# Altium PCB PCB1.PcbDoc
Units mil, origin at the board's own origin, x right, y up, seen from the top; angles counter-clockwise.
Board outline 3686.84 x 3989.91 mil, 2 copper layers (Top Layer, Bottom Layer); 93 components, 98 nets, 289 pads, 0 vias.
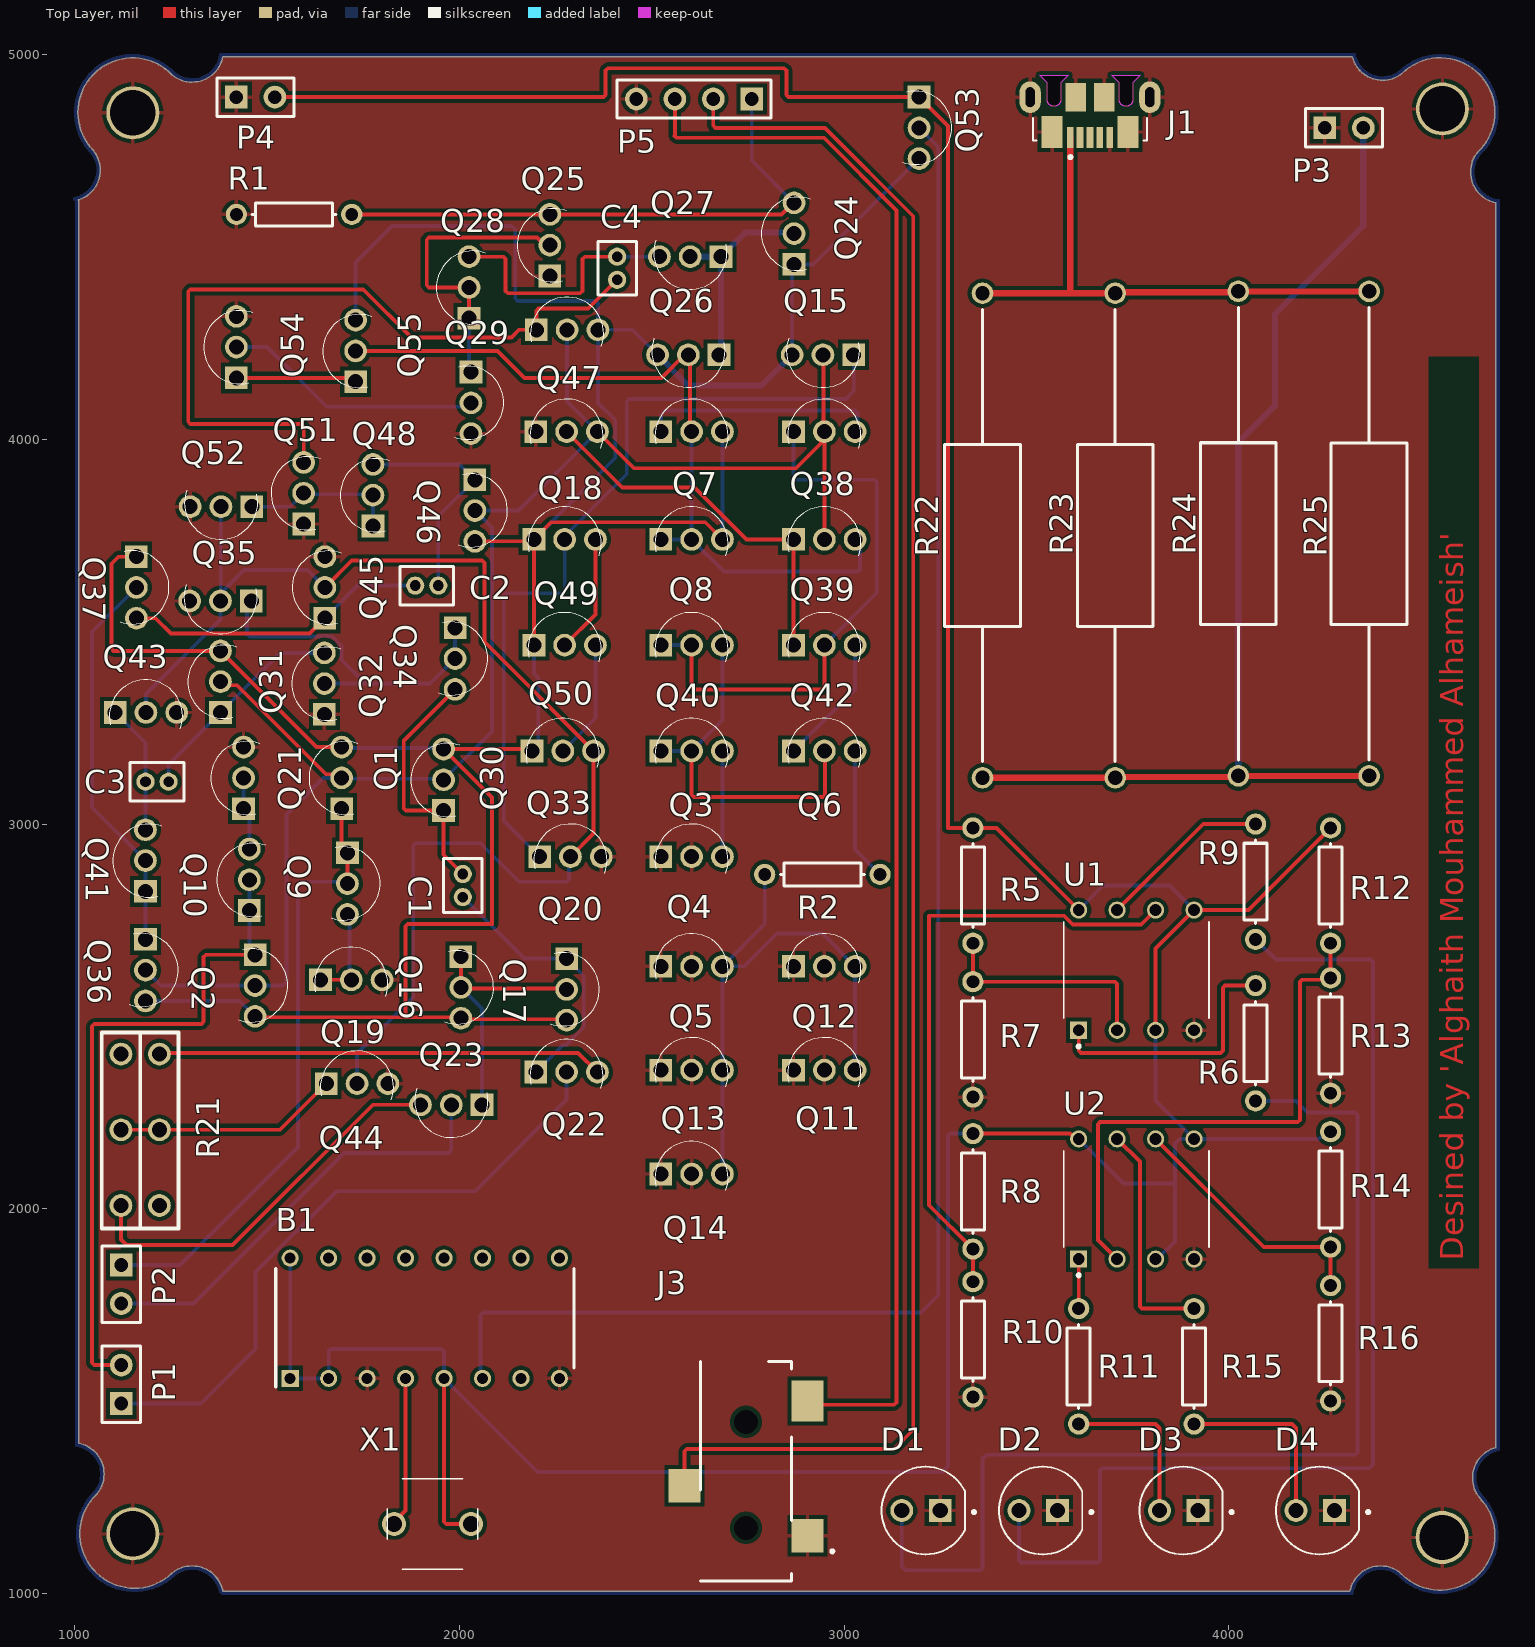
[diagram p0: Top Layer view]
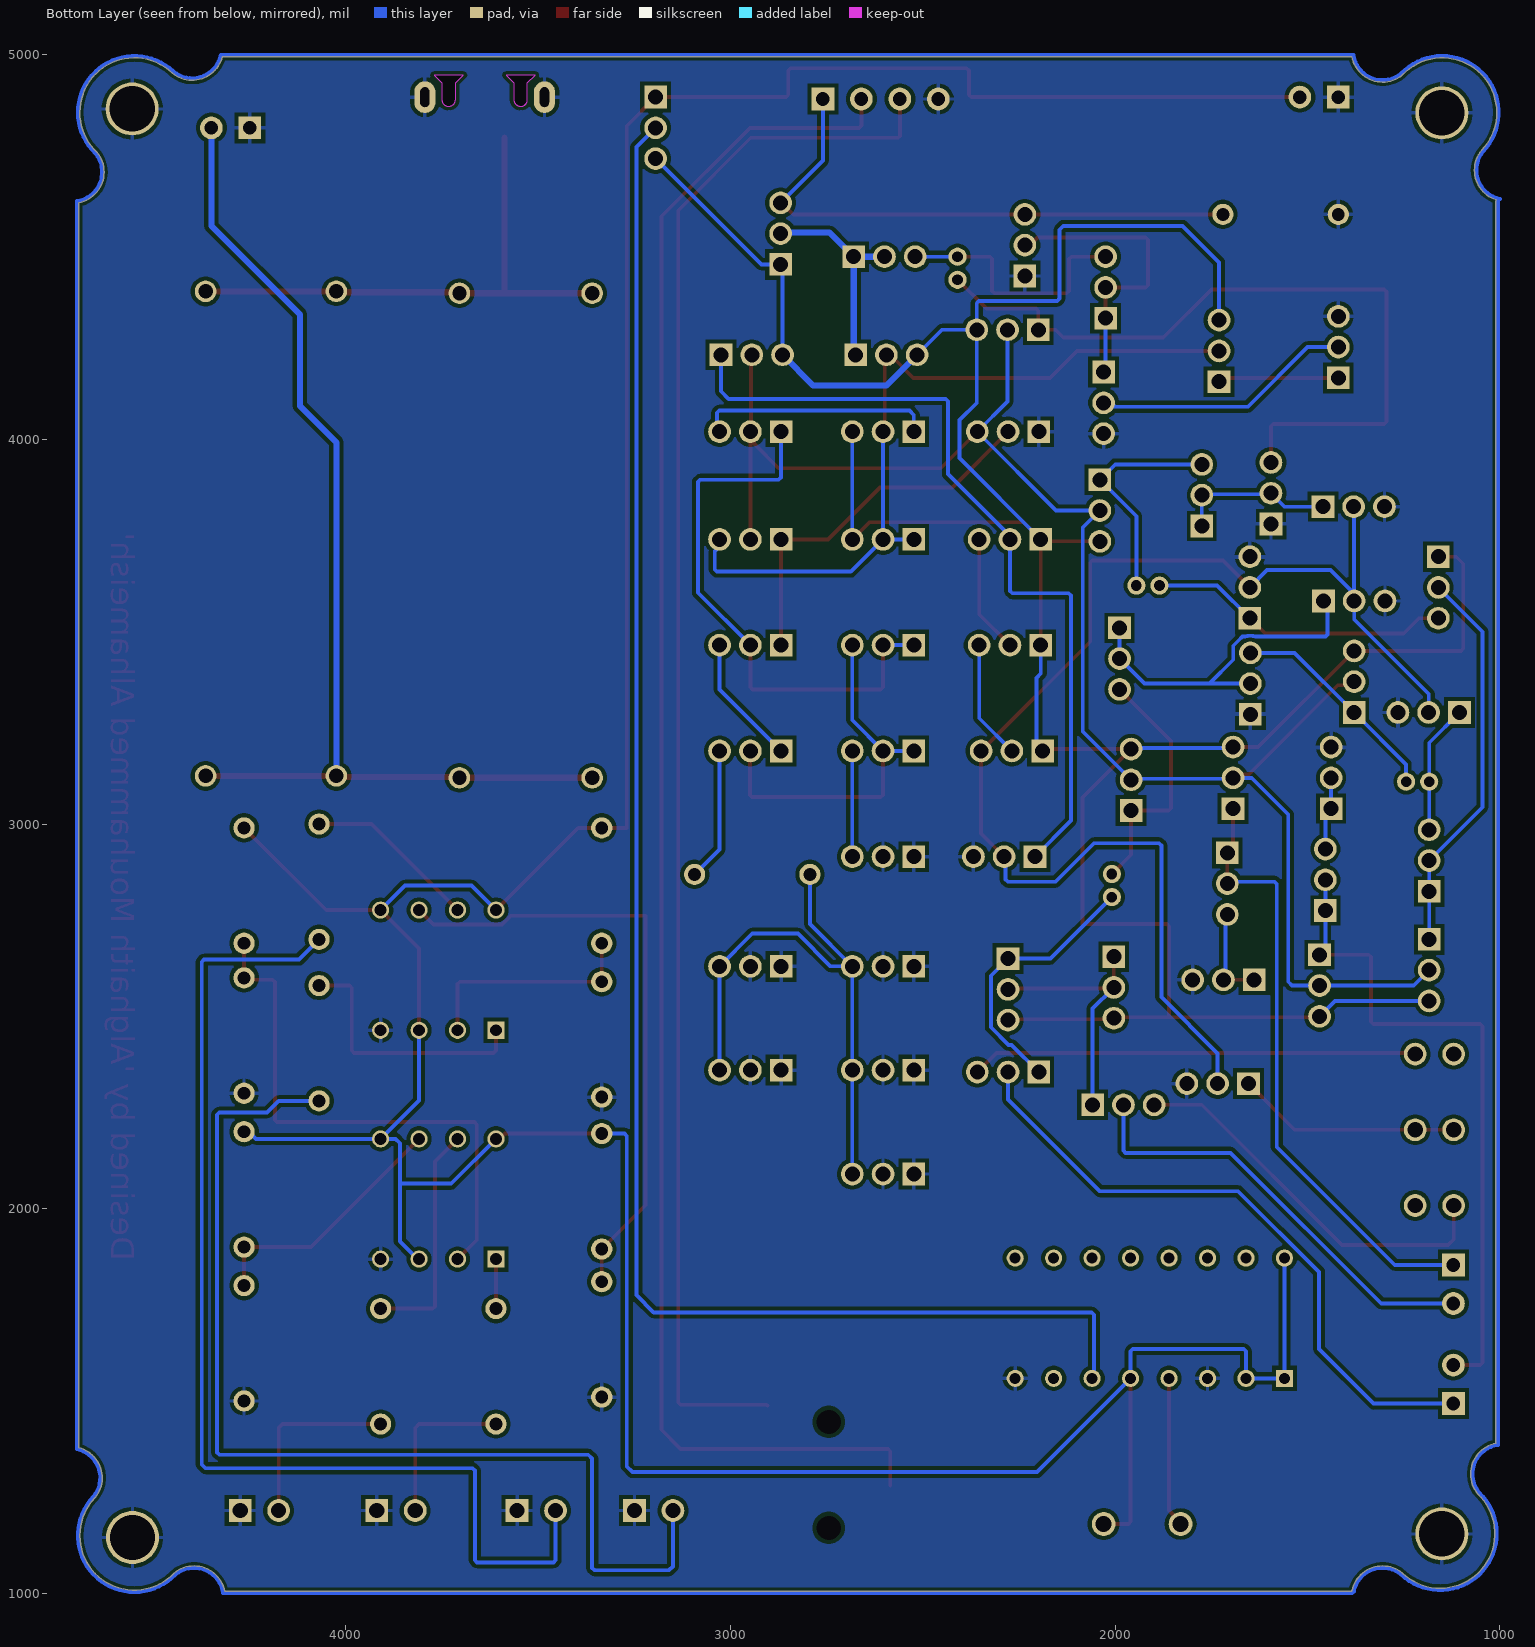
[diagram p1: Bottom Layer view, seen from below]
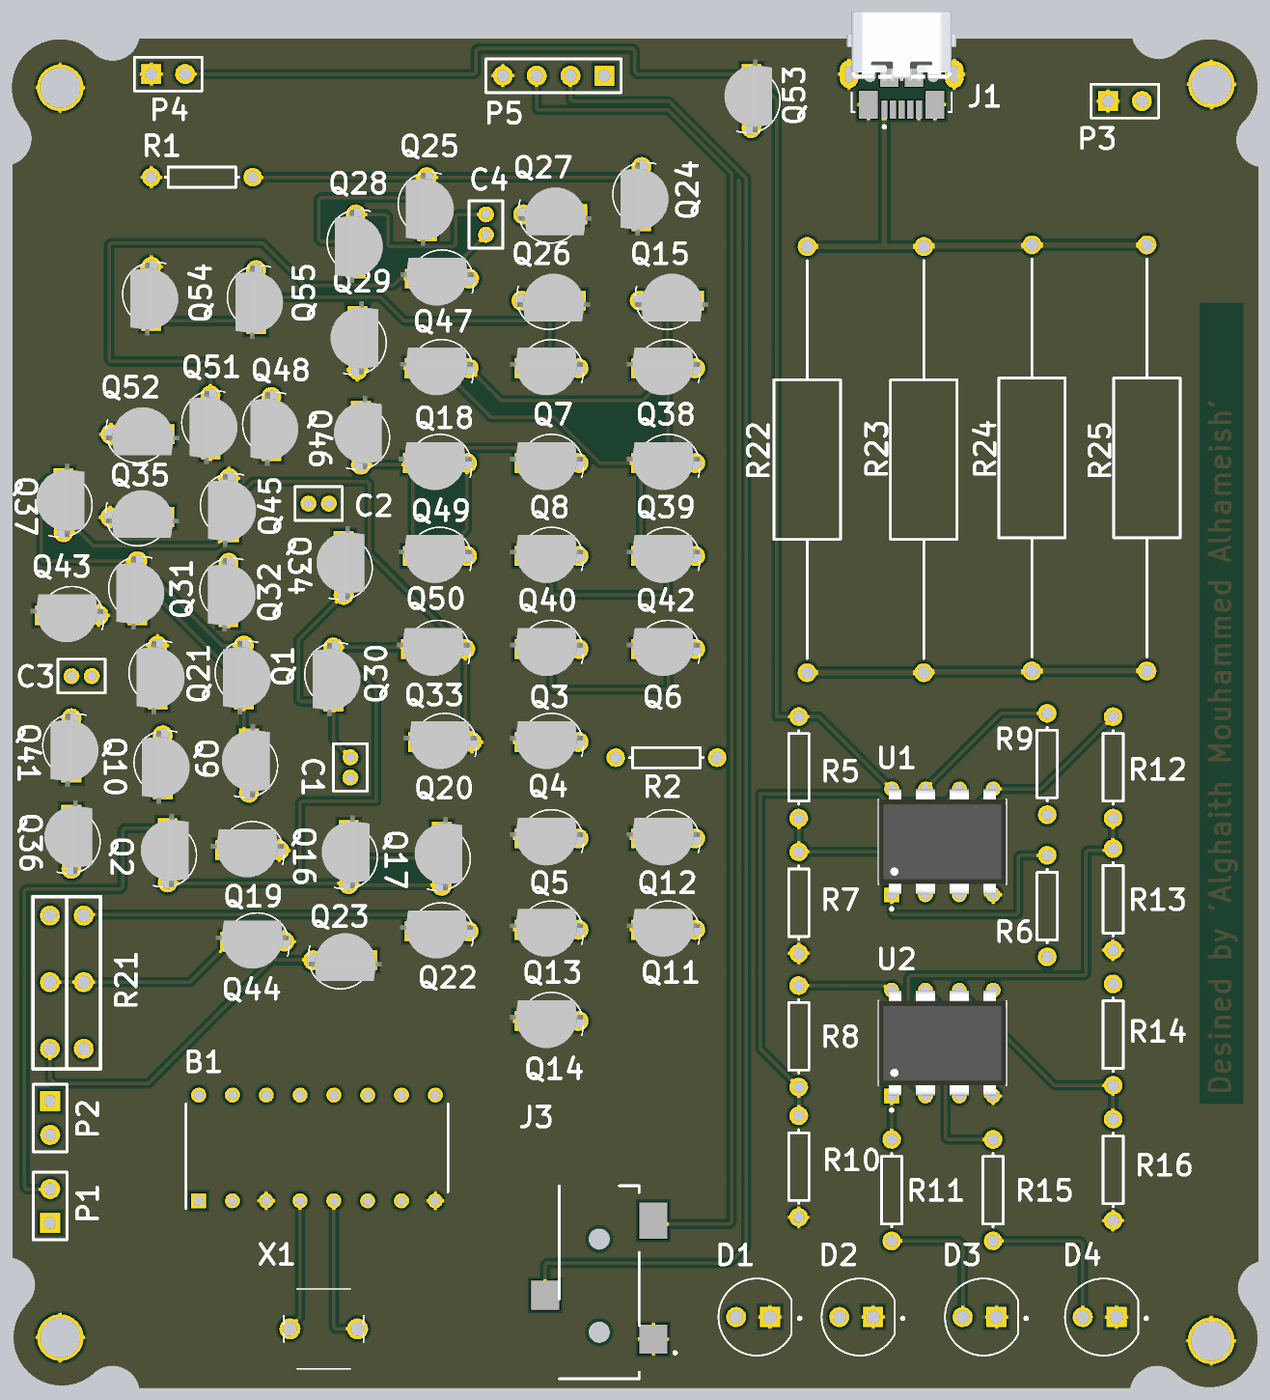
[diagram p2: 3D render of the assembled board from above, using the file's embedded part models]

## Layer stack, top to bottom
Top Solder: solder mask 0.4, Solder Resist, Dk 3.5
Top Layer: signal copper 1.4
Dielectric 1: dielectric 12.6, FR-4, Dk 4.8
Bottom Layer: signal copper 1.4
Bottom Solder: solder mask 0.4, Solder Resist, Dk 3.5

## Board outline
1057.59,1258.43 ccw(c995,1310) 1076.1,1310 ccw(c995,1310) 1010.07,1389.69 1010.07,4620.35 1009.49,4622.69 ccw(c985,4700) 1066.1,4700 ccw(c985,4700) 1047.59,4751.57 1047.1,4752.08 cw(c1150,4850) 1252.98,4947.83 1253.43,4947.41 ccw(c1305,5010) 1384.7,4994.98 4321.41,4994.98 ccw(c4400,5015) 4451.57,4952.41 4452.08,4952.9 cw(c4550,4850) 4692.04,4850 cw(c4550,4850) 4647.83,4747.02 4647.41,4746.57 ccw(c4710,4695) 4694.93,4615.31 4694.93,1378.58 ccw(c4715,1300) 4652.41,1248.43 4652.9,1247.92 cw(c4550,1150) 4692.04,1150 cw(c4550,1150) 4447.02,1052.17 4446.57,1052.59 ccw(c4395,990) 4315.31,1005.07 1384.61,1005.07 1384.51,1005.99 ccw(c1305,990) 1253.43,1052.59 1252.92,1052.1 cw(c1155,1155)

## Design rules (kind name [scope] priority, off if disabled: settings)
Clearance [All] p1: gap=10 ignorepadtopadclearanceinfootprint=FALSE except(0: Arc-Hole Track-Hole SMDPad-Hole THPad-Hole Via-Hole Fill-Hole Poly-Hole Region-Hole Text-Hole)
PolygonConnect [All] p1: connectstyle=Relief reliefconductorwidth=10 reliefentries=4 polygonreliefangle="90 Angle" airgapwidth=10
RoutingVias [All] p1: holewidth=28 width=50 viastyle="Through Hole" minholewidth=28 minwidth=50 maxholewidth=28 maxwidth=50
SolderMaskExpansion [All] p1: expansion=4 istentingtop=FALSE
Width [All] p1: maxlimit=20 minlimit=10 preferedwidth=10
30 further rules are at their usual default settings.

## Classes and differential pairs
component class Sheet2: Q54 Q55 Q56 Q57 Q58 Q59 Q60 Q61 Q62 Q63 Q64 Q65 Q66 Q67 Q68 Q69 Q70 Q71 Q72 Q73 Q74 Q75 Q76 Q77 Q78 Q79 Q80 Q81 Q82 Q83 Q84 Q85 Q86 Q87 Q88 Q89 Q90 Q91 Q92 Q93 Q94 Q95 Q96 Q97 Q98 Q99 Q100 Q101 Q102 Q103 Q104 Q105 V4 V5 V8 V9 V10

## Components (designator, comment, footprint, x,y, rotation, side; value= is the part's Value field where it differs from the comment)
B1 "CD74HC109E" DIP794W53P254L1930H508Q16N 1910,1715 r90 top
C1 "Cap" PCBComponent_1 2008.7,2810 r0 top value=500p
C2 "Cap" PCBComponent_1 1885,3620 r270 top value=1uF
C3 "Cap" PCBComponent_1 1243.7,3110 r90 top value=1uF (schematic designator C?)
C4 "Cap" PCBComponent_1 2410,4415 r0 top value=1uF
D1 "151054RS03000" LED_151054RS03000 3200,1215 r180 top
D2 "151054RS03000" LED_151054RS03000 3505,1215 r180 top
D3 "151054RS03000" LED_151054RS03000 3870,1215 r180 top
D4 "151054RS03000" LED_151054RS03000 4225,1215 r180 top
J1 "1932788-1" TE_1932788-1 3639.41,4889.72 r180 top
J3 "35RASMT4BHNTRX" 35RASMT4BHNTRX 2745,1319.61 r90 top
P1 "Header 2" HDR1X2 1120.73,1493.37 r90 top
P2 "Header 2" HDR1X2 1120.73,1853.37 r270 top
P3 "Header 2" HDR1X2 4250,4810 r0 top
P4 "Header 2" HDR1X2 1420,4890 r0 top
P5 "Header 4" HDR1X4 2760,4885 r180 top
Q1 "BC557BRL1G" TO127P254X732-3 1653.7,3170 r90 top
Q2 "BC557BRL1G" TO127P254X732-3 1508.7,2530 r270 top
Q3 "BC337-40_A1G" TO127P254X732-3 2653.7,3230 r0 top
Q4 "BC557BRL1G" TO127P254X732-3 2653.7,2955 r0 top
Q5 "BC557BRL1G" TO127P254X732-3 2653.7,2670 r0 top
Q6 "BC337-40_A1G" TO127P254X732-3 2998.7,3230 r0 top
Q7 "BC557BRL1G" TO127P254X732-3 2653.7,4060 r0 top
Q8 "BC557BRL1G" TO127P254X732-3 2653.7,3780 r0 top
Q9 "BC337-40_A1G" TO127P254X732-3 1748.7,2795 r270 top
Q10 "BC337-40_A1G" TO127P254X732-3 1413.7,2905 r90 top
Q11 "BC557BRL1G" TO127P254X732-3 2998.7,2400 r0 top
Q12 "BC557BRL1G" TO127P254X732-3 2998.7,2670 r0 top
Q13 "BC557BRL1G" TO127P254X732-3 2653.7,2400 r0 top
Q14 "BC557BRL1G" TO127P254X732-3 2653.7,2130 r0 top
Q15 "BC557BRL1G" TO127P254X732-3 2895,4180 r180 top
Q16 "BC557BRL1G" TO127P254X732-3 2043.7,2525 r270 top
Q17 "BC557BRL1G" TO127P254X732-3 2318.7,2520 r270 top
Q18 "BC557BRL1G" TO127P254X732-3 2328.7,4060 r0 top
Q19 "BC337-40_A1G" TO127P254X732-3 1768.7,2635 r0 top
Q20 "BC337-40_A1G" TO127P254X732-3 2338.7,2955 r0 top
Q21 "BC337-40_A1G" TO127P254X732-3 1398.7,3170 r90 top
Q22 "2n2222" TO127P254X732-3 2328.7,2395 r0 top
Q23 "2n2222" TO127P254X732-3 1928.7,2230 r180 top
Q24 "2n2222" TO127P254X732-3 2830,4585 r90 top
Q25 "2n3906" TO127P254X732-3 2195,4555 r90 top
Q26 "2n3906" TO127P254X732-3 2545,4180 r180 top
Q27 "2n2222" TO127P254X732-3 2550,4435 r180 top
Q28 "2n3906" TO127P254X732-3 1985,4445 r90 top
Q29 "2n2222" TO127P254X732-3 2070,4045 r270 top
Q30 "BC557BRL1G" TO127P254X732-3 1918.7,3165 r90 top
Q31 "BC557BRL1G" TO127P254X732-3 1338.7,3420 r90 top
Q32 "BC557BRL1G" TO127P254X732-3 1608.7,3415 r90 top
Q33 "BC337-40_A1G" TO127P254X732-3 2318.7,3230 r0 top
Q34 "BC557BRL1G" TO127P254X732-3 2028.7,3380 r270 top
Q35 "BC337-40_A1G" TO127P254X732-3 1328.7,3540 r180 top
Q36 "BC557BRL1G" TO127P254X732-3 1223.7,2570 r270 top
Q37 "BC337-40_A1G" TO127P254X732-3 1200,3565 r270 top
Q38 "BC557BRL1G" TO127P254X732-3 2998.7,4060 r0 top
Q39 "BC557BRL1G" TO127P254X732-3 2998.7,3780 r0 top
Q40 "BC337-40_A1G" TO127P254X732-3 2653.7,3505 r0 top
Q41 "BC337-40_A1G" TO127P254X732-3 1143.7,2955 r90 top
Q42 "BC337-40_A1G" TO127P254X732-3 2998.7,3505 r0 top
Q43 "BC337-40_A1G" TO127P254X732-3 1235,3330 r0 top
Q44 "BC337-40_A1G" TO127P254X732-3 1783.7,2365 r0 top
Q45 "BC337-40_A1G" TO127P254X732-3 1610,3665 r90 top
Q46 "BC557BRL1G" TO127P254X732-3 2080,3765 r270 top
Q47 "BC557BRL1G" TO127P254X732-3 2330,4325 r0 top
Q48 "BC557BRL1G" TO127P254X732-3 1735,3905 r90 top
Q49 "BC337-40_A1G" TO127P254X732-3 2323.7,3780 r0 top
Q50 "BC337-40_A1G" TO127P254X732-3 2323.7,3505 r0 top
Q51 "BC557BRL1G" TO127P254X732-3 1555,3910 r90 top
Q52 "BC337-40_A1G" TO127P254X732-3 1330,3785 r180 top
Q53 "BC337-40_A1G" TO127P254X732-3 3235,4760 r270 top
Q54 "BC337-40_A1G" TO127P254X732-3 1380,4290 r90 top (schematic designator Q107)
Q55 "BC557BRL1G" TO127P254X732-3 1690,4280 r90 top (schematic designator Q106)
R1 "Res1" AXIAL-0.3 1570,4585 r0 top value=6k
R2 "Res1" AXIAL-0.3 2943.7,2868.94 r0 top value=350
R5 "Res1" AXIAL-0.3 3335,2840 r90 top value=196
R6 "Res1" AXIAL-0.3 4070,2430 r90 top value=1k
R7 "Res1" AXIAL-0.3 3335,2440 r90 top value=10k
R8 "Res1" AXIAL-0.3 3335,2045 r90 top value=500
R9 "Res1" AXIAL-0.3 4070,2850 r90 top value=1k
R10 "Res1" AXIAL-0.3 3335,1660 r90 top value=25k
R11 "Res1" AXIAL-0.3 3610,1590 r90 top value=1k
R12 "Res1" AXIAL-0.3 4265,2840 r90 top value=1020
R13 "Res1" AXIAL-0.3 4265,2450 r90 top value=50k
R14 "Res1" AXIAL-0.3 4265,2050 r90 top value=10.4k
R15 "Res1" AXIAL-0.3 3910,1590 r90 top value=1k
R16 "Res1" AXIAL-0.3 4265,1650 r90 top value=500k
R21 "PTD901-2015F-B104" PTD9012015FB104 1120,2008.15 r90 top (schematic designator B?)
R22 "MCKNP02SJ0200A10" RESAD3200W75L1200D500 3360,3120.16 r90 top (schematic designator X2)
R23 "MCKNP02SJ0200A10" RESAD3200W75L1200D500 3705,3120.16 r90 top (schematic designator X3)
R24 "MCKNP02SJ0200A10" RESAD3200W75L1200D500 4025,3125.16 r90 top (schematic designator X4)
R25 "MCKNP02SJ0200A10" RESAD3200W75L1200D500 4365,3125 r90 top (schematic designator X5)
U1 "LM358PE4" DIP794W45P254L959H508Q8 3760,2620 r90 top
U2 "LM358PE4" DIP794W45P254L959H508Q8 3760,2025 r90 top
X1 "BUTT-4" BUTT4 1930,1180 r0 top

## Footprints (in the part's own frame and the unit in brackets; to place one, negate y for a bottom-side part, rotate by r counter-clockwise, add the part's x,y. Pads: shape width x height; smd on the part's side, far side on the other; paste and mask are expansions set on the pad)
35RASMT4BHNTRX [mm]
  rect 2.2x2.1 smd: 1(-4.318,-4.064) 2(-1.016,4.064)
  rect 2.7x2.1 smd: 3(4.572,-4.064)
  round 0.8 hole 1.6 unplated: MH1(-3.8,0) MH2(3.2,0)
  silkscreen extent -7.3,-5.8 7.2,3
AXIAL-0.3 [mm] "Axial Device, Thru-Hole; 2 Leads; 0.3 in Pin Spacing"
  round 1.4 hole 0.85: 1(-3.81,0) 2(3.81,0)
  silkscreen extent -2.77,-0.76 2.77,0.76
BUTT4 [mm]
  round 1.575 hole 1.05: A1(2.54,0) B1(-2.54,0)
  silkscreen extent -3,-3 3,3
DIP794W45P254L959H508Q8 [mm]
  rect 1.13x1.13 / inner round 1.13 / far side rect 1.13x1.13 hole 0.78: 1(-3.97,3.81)
  round 1.13 hole 0.78: 2(-3.97,1.27) 3(-3.97,-1.27) 4(-3.97,-3.81) 5(3.97,-3.81) 6(3.97,-1.27) 7(3.97,1.27) 8(3.97,3.81)
  silkscreen extent -5.13,-4.79 3.18,4.79, body extent -3.94,-4.79 3.94,4.79, height 5.08
DIP794W53P254L1930H508Q16N [mm]
  rect 1.13x1.13 / inner round 1.13 / far side rect 1.13x1.13 hole 0.73: 1(-3.97,8.89)
  round 1.13 hole 0.73: 2(-3.97,6.35) 3(-3.97,3.81) 4(-3.97,1.27) 5(-3.97,-1.27) 6(-3.97,-3.81) 7(-3.97,-6.35) 8(-3.97,-8.89) 9(3.97,-8.89) 10(3.97,-6.35) 11(3.97,-3.81) 12(3.97,-1.27) 13(3.97,1.27) 14(3.97,3.81) 15(3.97,6.35) 16(3.97,8.89)
  silkscreen extent -4.53,-9.84 3.3,9.84
HDR1X2 [mm] "Connector; Header; 2 Position"
  rect 1.5x1.5 hole 0.9: 1(0,0)
  round 1.5 hole 0.9: 2(2.54,0)
  silkscreen extent -1.27,-1.27 3.81,1.27
HDR1X4 [mm] "Connector; Header; 4 Position"
  rect 1.5x1.5 hole 0.9: 1(0,0)
  round 1.5 hole 0.9: 2(2.54,0) 3(5.08,0) 4(7.62,0)
  silkscreen extent -1.27,-1.27 8.89,1.27
LED_151054RS03000 [mm]
  round 1.508 hole 1: A(1.27,0)
  rect 1.508x1.508 hole 1: C(-1.27,0)
  silkscreen extent -3.6,-2.9 2.6,2.9
PCBComponent_1 [mm]
  round 1.2 hole 0.7: 1(0,0) 2(0,1.524)
  silkscreen extent -1.27,-1.02 1.27,2.54
PTD9012015FB104 [mm]
  round 1.5 hole 1: 1(0,0) 2(5,0) 3(10,0) 4(0,-2.54) 5(5,-2.54) 6(10,-2.54)
  silkscreen extent -1.52,-3.81 11.43,1.27
RESAD3200W75L1200D500 [mm]
  round 1.425 hole 0.95: 1(0,0) 2(32,0)
  silkscreen extent 1.06,-2.5 30.94,2.5
TE_1932788-1 [mm]
  rect 0.45x1.38 smd: 1(1.3,2.66) 2(0.65,2.66) 3(0,2.66) 4(-0.65,2.66) 5(-1.3,2.66)
  rect 1.4x2.1 smd: SH1(-2.5,2.3) SH2(2.5,2.3)
  oval 1.4x2.1 hole 0.6 slot 1.3 at 90 deg: SH3(-3.95,0) SH6(3.95,0)
  rect 1.375x1.9 smd: SH4(-0.937,0) SH5(0.937,0)
  Keep-Out Layer board cut-out: 1.425,-1.45 1.425,-1.45 1.925,-0.95 1.925,0.15 1.926,0.174 1.927,0.197 1.931,0.22 1.935,0.244 1.94,0.266 1.947,0.289 1.955,0.311 1.964,0.333 1.974,0.354 1.985,0.375 1.998,0.395 2.011,0.415 2.025,0.433 2.041,0.451 2.057,0.468 2.074,0.484 2.092,0.5 2.11,0.514 2.13,0.527 2.15,0.54 2.171,0.551 2.192,0.561 2.214,0.57 2.236,0.578 2.259,0.585 2.281,0.59 2.305,0.594 2.328,0.598 2.351,0.599 2.375,0.6 2.395,0.6 2.419,0.6 2.443,0.598 2.466,0.594 2.49,0.59 2.513,0.584 2.536,0.576 2.558,0.568 2.58,0.558 2.601,0.548 2.621,0.535 2.641,0.522 2.661,0.508 2.679,0.493 2.696,0.477 2.713,0.459 2.728,0.441 2.743,0.423 2.756,0.403 2.769,0.382 2.78,0.361 2.79,0.34 2.799,0.318 2.807,0.295 2.813,0.272 2.818,0.249 2.822,0.225 2.824,0.201 2.825,0.178 2.825,0.15 2.825,-0.95 3.325,-1.45
  Keep-Out Layer board cut-out: -3.325,-1.45 -3.325,-1.45 -2.825,-0.95 -2.825,0.15 -2.825,0.178 -2.824,0.201 -2.822,0.225 -2.818,0.249 -2.813,0.272 -2.807,0.295 -2.799,0.318 -2.79,0.34 -2.78,0.361 -2.769,0.382 -2.756,0.403 -2.743,0.423 -2.728,0.441 -2.713,0.459 -2.696,0.477 -2.679,0.493 -2.661,0.508 -2.641,0.522 -2.621,0.535 -2.601,0.548 -2.58,0.558 -2.558,0.568 -2.536,0.576 -2.513,0.584 -2.49,0.59 -2.466,0.594 -2.443,0.598 -2.419,0.6 -2.395,0.6 -2.375,0.6 -2.351,0.599 -2.328,0.598 -2.305,0.594 -2.281,0.59 -2.259,0.585 -2.236,0.578 -2.214,0.57 -2.192,0.561 -2.171,0.551 -2.15,0.54 -2.13,0.527 -2.11,0.514 -2.092,0.5 -2.074,0.484 -2.057,0.468 -2.041,0.451 -2.025,0.433 -2.011,0.415 -1.998,0.395 -1.985,0.375 -1.974,0.354 -1.964,0.333 -1.955,0.311 -1.947,0.289 -1.94,0.266 -1.935,0.244 -1.931,0.22 -1.927,0.197 -1.926,0.174 -1.925,0.15 -1.925,-0.95 -1.425,-1.45
  silkscreen extent -3.76,1.37 3.76,4.06, body extent -4.1,-4.66 4.1,0.49, height 2.53
TO127P254X732-3 [mil]
  rect 59x59 / inner round 59 / far side rect 59x59 hole 39: 1(-130,-40)
  round 59 hole 39: 2(-50,-40) 3(30,-40)
  silkscreen extent -146,-83 45,45, body extent -173,-120 43,22, height 331

## Part data
B1: "High Speed CMOS Logic Dual Positive-Edge-Triggered J-K Flip-Flops with Set and Reset", Manufacturer_Name="Texas Instruments", Mouser Part Number=595-CD74HC109E, Datasheet Link=http://www.ti.com/lit/gpn/CD74HC109, Geometry.Height=5.08mm, Manufacturer_Part_Number=CD74HC109E, Mouser Price/Stock=https://www.mouser.co.uk/ProductDetail/Texas-Instruments/CD74HC109E?qs=YxwvVplHM%2Fmqq8OTpV%2FwRQ%3D%3D
C1 C2 C3 C4: "Capacitor", LatestRevisionDate=17-Jul-2002, LatestRevisionNote="Re-released for DXP Platform.", PackageDescription="Radial Cap, Thru-Hole; 2 Leads; 0.3 in Pin Spacing", PackageReference=RAD-0.3, Published=8-Jun-2000, Publisher="Altium Limited"
D1 D2 D3 D4: "Red 623nm LED Indication - Discrete 1.9V Radial", Package=None, Availability=Unavailable, MP=151054RS03000, Price=None
J1: "USB - micro B USB 2.0 Receptacle Connector 5 Position Surface Mount, Right Angle", Package=None, Availability="In Stock", Check_prices=https://www.snapeda.com/parts/1932788-1/TE+Connectivity+AMP+Connectors/view-part/?ref=eda, MF="TE Connectivity", MP=1932788-1, Price=None, Purchase-URL=https://pricing.snapeda.com/search?q=1932788-1&ref=eda, SnapEDA_Link=https://www.snapeda.com/parts/1932788-1/TE+Connectivity+AMP+Connectors/view-part/?ref=snap
J3: "Phone Connectors SMT 3.5MM PHONE JACK", Manufacturer_Name=Switchcraft, Mouser Part Number=502-35RASMT4BHNTRX, Arrow Part Number=35RASMT4BHNTRX, Arrow Price/Stock=https://www.arrow.com/en/products/35rasmt4bhntrx/switchcraft?region=nac, Datasheet Link=https://www.arrow.com/en/products/35rasmt4bhntrx/switchcraft, Geometry.Height=5.127mm, Manufacturer_Part_Number=35RASMT4BHNTRX, Mouser Price/Stock=https://www.mouser.co.uk/ProductDetail/Switchcraft/35RASMT4BHNTRX?qs=iwvYsH9bSFa%252BoLnvLbECxQ%3D%3D
P1 P2 P3 P4: "Header, 2-Pin", LatestRevisionDate=17-Jul-2002, LatestRevisionNote="Re-released for DXP Platform.", Publisher="Altium Limited"
P5: "Header, 4-Pin", LatestRevisionDate=17-Jul-2002, LatestRevisionNote="Re-released for DXP Platform.", Publisher="Altium Limited"
Q1 Q2 Q4 Q5 Q7 Q8 Q11 Q12 Q13 Q14 Q15 Q16 Q17 Q18 Q30 Q31 Q32 Q34 Q36 Q38 Q39 Q46 Q47 Q48 Q51 Q55: "Bipolar (BJT) Transistor PNP 45V 100mA 320MHz 625mW Through Hole TO-92-3", Package="TO-92 ON Semiconductor", Arrow_Electronics-Purchase-URL=https://snapeda.com/shop?store=Arrow+Electronics&id=3219064, Availability=Good, DigiKey-Purchase-URL=https://snapeda.com/shop?store=DigiKey&id=3219064, MF="ON Semiconductor", MP=BC557BRL1G, Price=None, SnapEDA_Link=https://www.snapeda.com/parts/BC557BRL1G/ON%20Semiconductor/view-part/3219064/?ref=snap
Q3 Q6 Q9 Q10 Q19 Q20 Q21 Q33 Q35 Q37 Q40 Q41 Q42 Q43 Q44 Q45 Q49 Q50 Q52 Q53 Q54: "TO-92, 50V, 0.8A, NPN Bipolar Transistor", Package="TO-92 Taiwan Semiconductor", Availability="In Stock", Check_prices=https://www.snapeda.com/parts/BC337-40%20A1G/Taiwan+Semiconductor/view-part/?ref=eda, MF="Taiwan Semiconductor", MP="BC337-40 A1G", Price=None, Purchase-URL="https://pricing.snapeda.com/search/part/BC337-40 A1G/?ref=eda", SnapEDA_Link=https://www.snapeda.com/parts/BC337-40%20A1G/Taiwan+Semiconductor/view-part/?ref=snap
Q22 Q23 Q24 Q27 Q29: library part BC337-40_A1G, "TO-92, 50V, 0.8A, NPN Bipolar Transistor", Package="TO-92 Taiwan Semiconductor", Availability="In Stock", Check_prices=https://www.snapeda.com/parts/BC337-40%20A1G/Taiwan+Semiconductor/view-part/?ref=eda, MF="Taiwan Semiconductor", MP="BC337-40 A1G", Price=None, Purchase-URL="https://pricing.snapeda.com/search/part/BC337-40 A1G/?ref=eda", SnapEDA_Link=https://www.snapeda.com/parts/BC337-40%20A1G/Taiwan+Semiconductor/view-part/?ref=snap
Q25 Q26 Q28: library part BC557BRL1G, "Bipolar (BJT) Transistor PNP 45V 100mA 320MHz 625mW Through Hole TO-92-3", Package="TO-92 ON Semiconductor", Arrow_Electronics-Purchase-URL=https://snapeda.com/shop?store=Arrow+Electronics&id=3219064, Availability=Good, DigiKey-Purchase-URL=https://snapeda.com/shop?store=DigiKey&id=3219064, MF="ON Semiconductor", MP=BC557BRL1G, Price=None, SnapEDA_Link=https://www.snapeda.com/parts/BC557BRL1G/ON%20Semiconductor/view-part/3219064/?ref=snap
R1 R2 R5 R6 R7 R8 R9 R10 R11 R12 R13 R14 R15 R16: "Resistor", LatestRevisionDate=17-Jul-2002, LatestRevisionNote="Re-released for DXP Platform.", PackageDescription="Axial Device, Thru-Hole; 2 Leads; 0.3 in Pin Spacing", PackageReference=AXIAL-0.3, Published=8-Jun-2000, Publisher="Altium Limited"
R21: "Potentiometers PANEL CONTROL 9MM-ST-CARBON", Manufacturer_Name=Bourns, Mouser Part Number=652-PTD9012015FB104, Datasheet Link=https://componentsearchengine.com/Datasheets/1/PTD901-2015F-B104.pdf, Geometry.Height=11.9mm, Manufacturer_Part_Number=PTD901-2015F-B104, Mouser Price/Stock=https://www.mouser.co.uk/ProductDetail/Bourns/PTD901-2015F-B104/?qs=%2FxQVPCMPNzjT537flibtBg%3D%3D
R22 R23 R24 R25: "MULTICOMP - MCKNP02SJ0200A10 - RESISTOR, WIREWOUND, 20R, 5%, 2WS", Manufacturer_Name=MULTICOMP, Datasheet Link=http://www.farnell.com/datasheets/1447692.pdf, Manufacturer_Part_Number=MCKNP02SJ0200A10
U1 U2: "Dual, 30-V, 700-kHz operational amplifier", Package="PDIP-8 Texas", Availability="In Stock", Check_prices=https://www.snapeda.com/parts/LM358PE4/Texas+Instruments/view-part/?ref=eda, MF="Texas Instruments", MP=LM358PE4, Price=None, Purchase-URL=https://pricing.snapeda.com/search/part/LM358PE4/?ref=eda, SnapEDA_Link=https://www.snapeda.com/parts/LM358PE4/Texas+Instruments/view-part/?ref=snap
X1: "Tactile Switches MINI PUSH BUTTON SWITCH 4-PIN QTY. 4", Manufacturer_Name=Gravitech, Mouser Part Number=992-BUTT-4, Datasheet Link=http://site.gravitech.us/Components/BUTT-4/BUTT-4_datasheet.pdf, Geometry.Height=9.5mm, Manufacturer_Part_Number=BUTT-4, Mouser Price/Stock=https://www.mouser.co.uk/ProductDetail/Gravitech/BUTT-4?qs=Vxac6xGyzPm51iLpy8GNew%3D%3D

## Free pads (board coordinates)
  round 137.8 hole 118.11: 2(1150.77,1154.17) 2(1150.77,4849.17) 2(4555,1145) 2(4555.77,4859.17)

## Nets (pads, with @x,y where several pads share a name; then routed paths per layer and width w, separated by ;. In a path a pad name is that pad's centre, name@x,y a point inside that pad or via, vN(x,y) a via of type N, cw(c..) or ccw(c..) an arc to the next point about the centre after c; other vN are vias at no path point)
base: Q1.2 Q2.2 Q15.2 Q18.3 Q30.2 Q31.2 Q36.2 Q38.2 Q39.2 Q46.2 Q47.2 | length 4308.6
  Top Layer w10: Q31.2 1388.08,3360.62 1421.34,3360.62 1652.58,3129.38 1684.33,3129.38 Q1.2 ; Q18.3 2453.7,3925 2875,3925 2939.33,3989.33 2939.33,3997.36 2940.66,3998.7 Q38.2@2948.7,3998.7 ; Q15.2 2946.85,4218.15 2946.85,4021.85 Q38.2 Q38.2@2948.7,3998.7 ; Q39.2 Q38.2@2948.7,3998.7
  Bottom Layer w10: Q36.2 1223.7,2580 Q2.2 1540,2580 1550,2590 1550,3025 1645,3120 Q1.2 1696.2,3117.5 1956.2,3117.5 Q30.2 2084.5,3240.8 2084.5,3770.5 Q46.2 2153.7,3815 Q18.3 2280,4098.7 Q47.2
base1: Q20.2 Q33.3 Q35.2 Q43.2 Q44.2 Q45.2 Q52.2 | length 3478
  Top Layer w10: Q45.2 1720,3685 2059.14,3685 2065,3679.14 2065,3473.7 Q33.3 2348.7,2975 Q20.2
  Bottom Layer w10: Q43.2 1185,3338.15 1378.7,3531.85 1378.7,3598.7 Q35.2@1379.35,3599.35 ; Q52.2 1379.35,3824.35 Q35.2@1379.35,3599.35 ; Q45.2 1605,3660 1440,3660 1388.08,3608.08 1388.08,3602.64 1384.79,3599.35 Q35.2@1379.35,3599.35 ; Q44.2 1733.7,2403.7 1880,2550 1880,2944.14 1885.86,2950 2055,2950 2155,2850 2279.14,2850 2285,2855.86 2285,2911.3 Q20.2
base2: P1.2 Q2.1 Q10.1 Q10.2 | length 1753.5
  Top Layer w10: P1.2 1050.86,1593.37 1045,1599.23 1045,2474.14 1050.86,2480 1329.14,2480 1335,2485.86 1335,2654.14 1340.86,2660 Q2.1
  Bottom Layer w10: Q10.2 Q10.1 1453.7,2675 Q2.1
base3: P2.1 Q1.1 Q9.1 Q9.2 | length 1604.8
  Top Layer w10: Q1.1 1693.7,2940 Q9.1 Q9.2
  Bottom Layer w10: P2.1 1273.37,1853.37 1580,2160 1580,2844.14 1585.86,2850 1703.7,2850 Q9.2
base4: Q7.2 Q8.1 Q8.2 Q26.2 Q39.3 Q55.2 | length 2040.2
  Top Layer w10: Q55.2 2099.13,4230 2169.13,4160 2525,4160 2585,4220 Q26.2 2599.35,4215.65 2599.35,4024.35 Q7.2
  Bottom Layer w10: Q8.1 Q8.2 ; Q7.2 Q8.2 ; Q39.3 3038.08,3730.62 3038.08,3712.83 3041.26,3709.64 3041.26,3662.12 3035.4,3656.26 2687.44,3656.26 Q8.2
base5: Q29.2 Q54.2 | length 678.3
  Bottom Layer w10: Q54.2 1500,4240 1655,4085 1999.64,4085 2000.27,4085.62 2020.62,4085.62 Q29.2
GND: B1.3 B1.8 D1.C D2.C D3.C D4.C J1.5 J1.SH1 J1.SH2 J1.SH3 J1.SH4 J1.SH5 J1.SH6 J3.1 P3.1 P4.1 P5.4 pad.2 Q4.1 Q4.2 Q5.1 Q5.2 Q11.1 Q11.2 Q12.1 Q12.2 Q13.1 Q13.2 Q14.1 Q14.2 Q18.1 Q19.3 Q20.3 Q21.3 Q25.1 Q29.3 Q32.1 Q35.3 Q43.3 Q44.3 Q45.3 Q51.1 Q52.3 Q54.3 R1.1 R7.1 R10.1 R13.1 R16.1 U1.4 U2.4
NetB1_4: B1.4 X1.B1 | length 391.1
  Top Layer w10: X1.B1 1830,1185.06 1860,1215.06 B1.4
NetB1_6: B1.6 Q53.2 | length 4434.3
  Bottom Layer w10: B1.6 2055,1563.7 2055,1724.14 2060.86,1730 3200,1730 3245,1775 3245,4760 Q53.2
NetB?_1: Q23.3 R21.1 | length 1045
  Top Layer w10: R21.1@1120,2028.93 1120,1920 1135,1905 1410,1905 1775,2270 Q23.3
NetB?_2: Q44.1 R21.2 R21.5 | length 583.4
  Top Layer w10: R21.2 R21.5 1533.7,2205 Q44.1
NetB?_6: Q22.3 R21.6 | length 1165.2
  Top Layer w10: R21.6@1214.25,2405 2308.7,2405 Q22.3
NetC1_1: C1.1 Q17.1 Q22.1 | length 705.9
  Bottom Layer w10: C1.1 2168.7,2650 Q17.1 2323.2,2605.5 2323.2,2471.57 2277.17,2425.53 2269.23,2425.53 Q22.1
NetC1_2: C1.2 Q30.1 Q34.3 | length 656.4
  Top Layer w10: Q34.3 1855,3216.3 1855,3040.86 1860.86,3035 Q30.1 1958.7,2920 C1.2
NetC2_1: C2.1 Q37.3 Q45.1 | length 793.3
  Top Layer w10: Q37.3 1210,3535 1250,3495 1610,3495 Q45.1
  Bottom Layer w10: Q45.1 1735,3620 C2.1
NetC2_2: C2.2 Q46.1 Q48.3 | length 595.9
  Bottom Layer w10: Q48.3 2000,3935 Q46.1 1945,3800 C2.2
NetC3_1: C3.1 Q31.1 Q32.3 | length 570.1
  Bottom Layer w10: C3.1 1243.7,3155 Q31.1 1533.7,3445 Q32.3
NetC3_2: C3.2 Q41.3 Q43.1 | length 337.6
  Bottom Layer w10: Q43.1 1183.7,3211.3 C3.2 Q41.3
NetC4_1: C4.1 Q47.1 Q51.3 | length 1997.4
  Top Layer w10: Q51.3 1595,4034.14 1589.14,4040 1300.86,4040 1295,4045.86 1295,4384.14 1300.86,4390 1750,4390 1875,4265 2135,4265 2155,4285 Q47.1 2200,4334.14 2205.86,4340 2335,4340 C4.1
NetC4_2: C4.2 Q27.3 Q28.3 | length 671.3
  Top Layer w10: Q28.3 2114.14,4475 2120,4469.14 2120,4385.86 2125.86,4380 2314.14,4380 2320,4385.86 2320,4469.14 2325.86,4475 C4.2
  Bottom Layer w10: C4.2 Q27.3
NetC5_1: 
NetC5_2: 
NetC6_1: 
NetC6_2: 
NetC7_1: 
NetC7_2: 
NetC8_1: 
NetC8_2: 
NetD1_A: D1.A R6.1 | length 2785.4
  Bottom Layer w10: D1.A 3150,1070 3160,1060 3354.14,1060 3360,1065.86 3360,1350 3370,1360 4329.14,1360 4335,1365.86 4335,2244.14 4329.14,2250 4205,2250 4175,2280 R6.1
NetD2_A: D2.A R9.1 | length 2929.6
  Bottom Layer w10: D2.A 3455,1085.86 3460.86,1080 3659.14,1080 3665,1085.86 3665,1319.14 3670.86,1325 4365,1325 4375,1335 4375,2641.58 4369.14,2647.44 4122.56,2647.44 R9.1
NetD3_A: D3.A R11.1 | length 429.1
  Top Layer w10: R11.1 3810,1440 3820,1430 D3.A
NetD4_A: D4.A R15.1 | length 484.1
  Top Layer w10: R15.1 4165,1440 4175,1430 D4.A
NetJ1_1: J1.1 R22.2 R23.2 R24.2 R25.2 | length 1415
  Top Layer w10: R22.2@3359.11,4380.89 R22.2 ; 3588.23,4380.89 3589.11,4380 ; J1.1 J1.1@3589.11,4784.11 ; R23.2 R23.2@3707.5,4382.5 ; R24.2@4022.5,4382.5 R24.2 R24.2@4025.08,4384.92 ; R25.2@4364.92,4384.92 R25.2
  Top Layer w16: R22.2 3589.11,4380 R23.2 ; 3588.23,4380.89 J1.1 ; R23.2@3707.5,4382.5 R24.2@4022.5,4382.5 ; R24.2@4025.08,4384.92 R25.2@4364.92,4384.92
NetJ3_2: J3.2 P5.2 | length 4549.5
  Top Layer w10: J3.2 2585,1369.14 2590.86,1375 3130,1375 3180,1425 3180,4580 2950,4810 2665.86,4810 2660,4815.86 P5.2
NetJ3_3: J3.3 P5.3 | length 4087.9
  Top Layer w10: P5.3 2560,4790 2559.14,4789.14 2564.14,4784.14 2947.57,4784.14 3136.26,4595.46 3136.26,1496.26 3130,1490 2906.22,1490 J3.3@2904.45,1488.23
NetP1_1: P1.1 Q22.2 | length 1674.5
  Bottom Layer w10: P1.1 1326.63,1493.37 1327.5,1492.5 1470,1635 1470,1835 1680,2045 2040,2045 2278.7,2283.7 Q22.2
NetP2_2: P2.2 Q23.2 | length 1141.8
  Bottom Layer w10: P2.2 1308.37,1753.37 1700,2145 1972.84,2145 1978.7,2150.86 Q23.2
NetP3_2: P3.2 R22.1 R23.1 R24.1 R25.1 | length 2826.6
  Top Layer w10: R23.1 R23.1@3707.5,3122.66 ; R24.1@4022.5,3122.66 R24.1 R24.1@4025.08,3125.08 ; R25.1@4364.92,3125.08 R25.1
  Top Layer w16: R22.1 R23.1 ; R23.1@3707.5,3122.66 R24.1@4022.5,3122.66 ; R24.1@4025.08,3125.08 R25.1@4364.92,3125.08
  Bottom Layer w16: R24.1 4025,3992.18 4120,4087.18 4120,4325 4350,4555 P3.2
NetP5_1: P5.1 Q24.3 Q25.3 R1.2 | length 1478
  Top Layer w10: R1.2 Q25.3 2837.07,4585 2867.07,4615 Q24.3
  Bottom Layer w10: P5.1 2760,4725 Q24.3
NetQ1_3: Q1.3 Q2.3 Q7.3 Q8.3 Q15.3 Q16.3 Q17.3 Q24.1 Q26.3 Q30.3 Q31.3 Q33.1 Q36.3 Q37.1 Q46.3 Q47.3 Q49.1 Q50.1 Q53.3 Q55.3 | length 8110.4
  Top Layer w10: Q37.1 1113.24,3695 1095,3676.76 1095,3455.86 1100.86,3450 Q31.3 1628.7,3200 Q1.3 ; Q2.3 1471.2,2497.5 1860,2497.5 ; Q46.3 2188.7,3735 Q49.1 ; Q33.1 2183.7,3195 Q30.3 2085,3068.7 2085,2740 1865.86,2740 1860,2734.14 1860,2497.5 ; Q50.1 Q49.1 ; Q17.3 2276.2,2492.5 2006.2,2492.5 Q16.3 2001.2,2497.5 1860,2497.5 ; Q8.3 2639.2,3784.5 2238.2,3784.5 Q49.1
  Bottom Layer w10: Q36.3 1428.7,2540 Q2.3 ; Q1.3 1696.2,3197.5 1956.2,3197.5 Q30.3 ; Q55.3 1730,4460 1825,4555 2135,4555 2145,4545 2145,4365.86 2150.86,4360 2354.14,4360 2360,4354.14 Q47.3 ; Q33.1 2205,3206.3 2205,3380 2193.7,3391.3 Q50.1 ; Q49.1 2405,3951.3 2405,4050 2360,4095 Q47.3 ; Q26.3 2450,4285 Q47.3 ; Q8.3 Q7.3 ; Q15.3 2865,4450 Q24.1 2920,4455 Q53.3
  Bottom Layer w16: Q26.3 2595,4140 2785,4140 Q15.3
NetQ3_1: Q3.1 Q3.2 Q6.2 Q40.3 | length 968.1
  Top Layer w10: Q3.2 2603.7,3075.86 2609.56,3070 2944.14,3070 2950,3075.86 2950,3188.7 Q6.2
  Bottom Layer w10: Q3.1 Q3.2 2683.7,3270 Q40.3
NetQ3_3: Q3.3 Q4.3 | length 275
  Bottom Layer w10: Q4.3 Q3.3
NetQ5_3: Q5.3 Q11.3 Q12.3 Q13.3 Q14.3 R2.1 | length 1509.9
  Bottom Layer w10: Q14.3 Q13.3 Q5.3 ; R2.1 2793.7,2740 Q5.3 ; Q11.3 Q12.3 2943.7,2715 2825,2715 2740,2630 Q5.3
NetQ6_1: Q6.1 Q42.3 | length 341.3
  Bottom Layer w10: Q6.1 3028.7,3350 Q42.3
NetQ6_3: Q6.3 R2.2 | length 348
  Bottom Layer w10: Q6.3 3028.7,2933.94 R2.2
NetQ7_1: Q7.1 Q38.3 | length 613.9
  Bottom Layer w10: Q7.1 2523.7,4063.7 2535,4075 3029.14,4075 3035,4069.14 3035,4026.3 Q38.3
NetQ9_3: Q9.3 Q19.1 Q19.2 | length 254.1
  Top Layer w10: Q19.1 Q19.2
  Bottom Layer w10: Q9.3 1713.7,2760 1713.7,2600 Q19.2
NetQ10_3: Q10.3 Q21.1 Q21.2 | length 191.2
  Bottom Layer w10: Q21.2 Q21.1 1453.7,3025 Q10.3
NetQ15_1: Q15.1 Q20.1 Q49.2 | length 2137.3
  Bottom Layer w10: Q20.1 2115,3008.7 2115,3594.14 2120.86,3600 2267.84,3600 2273.7,3605.86 Q49.2 2273.7,3748.7 2435,3910 2435,4099.14 2440.86,4105 3005,4105 3025,4125 Q15.1
NetQ16_1: Q16.1 Q16.2 Q17.2 Q23.1 | length 681.3
  Top Layer w10: Q16.1 Q16.2 2006.2,2572.5 2276.2,2572.5 Q17.2
  Bottom Layer w10: Q16.2@2006.2,2572.5 2058.7,2520 Q23.1
NetQ18_2: Q18.2 Q39.1 Q42.1 | length 981
  Top Layer w10: Q18.2 2423.39,3875.31 2611.32,3875.31 2746.63,3740 Q39.1 Q42.1
NetQ24_2: Q24.2 Q26.1 Q27.1 Q27.2 | length 554
  Bottom Layer w16: Q27.2 Q27.1 ; Q26.1 2680,4225 Q27.1 ; Q24.2 2867.5,4537.5 2742.5,4537.5 Q27.1
NetQ25_2: Q25.2 Q28.1 Q28.2 Q29.1 | length 783.5
  Top Layer w10: Q29.1@2025,4180 Q29.1 ; Q28.1 Q28.2 1920.86,4395 1915,4400.86 1915,4519.14 1920.86,4525 2202.07,4525 2222.07,4505 Q25.2
  Bottom Layer w10: Q29.1@2025,4180 Q28.1
NetQ32_2: Q32.2 Q34.1 Q34.2 Q35.1 | length 920.8
  Bottom Layer w10: Q35.1 1450.62,3571.92 1447.69,3568.99 1447.69,3493.17 1453.55,3487.31 1634.92,3487.31 cw(c1648.7,3445) 1662.48,3487.31 1669.32,3487.31 1680.17,3476.47 1693.2,3463.43 1693.2,3445 1693.2,3427.08 1755.28,3365 ; Q32.2 1755.28,3365 ; Q34.1 Q34.2 1923.7,3365 1755.28,3365
NetQ33_2: Q33.2 Q50.3 | length 310.2
  Bottom Layer w10: Q33.2 2353.7,3275 Q50.3
NetQ36_1: Q36.1 Q37.2 Q41.1 Q41.2 | length 1020.1
  Bottom Layer w10: Q37.2 1045,3500 1045,3043.7 Q41.2 Q41.1 Q36.1
NetQ38_1: Q38.1 Q40.1 Q40.2 Q42.2 | length 1468.8
  Top Layer w10: Q40.2 2603.7,3355.86 2609.56,3350 2942.84,3350 2948.7,3355.86 Q42.2
  Bottom Layer w10: Q40.1 Q40.2 ; Q38.1 2868.7,3901.3 2875,3895 3079.14,3895 3085,3889.14 3085,3601.3 Q42.2
NetQ48_1: Q48.1 Q48.2 Q51.2 Q52.1 | length 411.6
  Bottom Layer w10: Q52.1 1560,3825 Q51.2 1597.5,3857.5 1772.5,3857.5 Q48.2 Q48.1
NetQ49_3: Q49.3 Q50.2 | length 308.1
  Top Layer w10: Q50.2 2353.7,3545 Q49.3
NetQ54_1: 
NetQ54_3: 
NetQ56_1: 
NetQ59_1: 
NetQ62_1: 
NetQ63_1: 
NetQ64_1: 
NetQ65_3: 
NetQ71_1: 
NetQ73_1: 
NetQ74_1: 
NetQ74_2: 
NetQ76_3: 
NetQ79_1: 
NetQ81_3: 
NetQ82_3: 
NetQ87_3: 
NetQ89_3: 
NetQ90_3: 
NetQ95_2: 
NetQ95_3: 
NetQ96_2: 
NetQ97_3: 
NetQ98_3: 
NetQ100_3: 
NetQ106_1: Q54.1 Q55.1 | length 314.1
  Top Layer w10: Q54.1 1720,4160 Q55.1
NetR5_1: R5.1 R7.2 U1.2 | length 597.9
  Top Layer w10: R5.1 R7.2 3704.14,2590 3710,2584.14 U1.2
NetR6_2: R6.2 U1.1 | length 683.4
  Top Layer w10: U1.1 3610,2410.86 3615.86,2405 3979.14,2405 3985,2410.86 3985,2574.14 3990.86,2580 R6.2
NetR8_1: R8.1 R10.2 U1.6 | length 1612.3
  Top Layer w10: R10.2 R8.1 3221.25,2008.75 3221.25,2761.62 3572.01,2761.62 3574.94,2758.69 3594.57,2739.06 3772.76,2739.06 U1.6
NetR9_2: R9.2 U1.7 | length 452.7
  Top Layer w10: U1.7 3933.7,3000 R9.2
NetR11_2: R11.2 U2.1 | length 128.7
  Top Layer w10: R11.2 U2.1
NetR12_1: R12.1 R13.2 U2.2 | length 1433.8
  Top Layer w10: U2.2 3660,1918.7 3660,2219.14 3665.86,2225 4179.14,2225 4185,2230.86 4185,2589.14 4190.86,2595 4260,2595 R13.2 R12.1
NetR14_1: R14.1 R16.2 U2.6 | length 671.5
  Top Layer w10: U2.6 4091.3,1900 R14.1 R16.2
NetR15_2: R15.2 U2.7 | length 603.2
  Top Layer w10: U2.7 3768.99,2122.31 3768.99,1746.01 3775,1740 R15.2
NetV2_1: 
NetV5_2: 
NetV7_2: 
NetV8_2: 
Vcc: B1.1 B1.2 B1.5 B1.16 P4.2 Q53.1 R5.2 R8.2 R12.2 R14.2 U1.3 U1.5 U1.8 U2.3 U2.5 U2.8 X1.A1 | length 10614.8
  Top Layer w10: P4.2 2374.14,4890 2380,4895.86 2380,4959.14 2385.86,4965 2844.14,4965 2850,4959.14 2850,4895.86 2855.86,4890 Q53.1 3270,4815 3270,2990 R5.2 3396.3,2990 U1.8 ; B1.5 1960,1185.86 1965.86,1180 X1.A1 ; R8.2 3586.97,2195 3600.67,2181.3 U2.8 ; U1.3 3810,2676.3 U1.5 4051.3,2776.3 R12.2
  Bottom Layer w10: B1.16 B1.1 B1.2 1660,1629.14 1665.86,1635 1954.14,1635 1960,1629.14 B1.5 2203.7,1315 3255,1315 3270,1330 3270,2189.14 3275.86,2195 R8.2 ; U2.8 3726.3,2065 3855,2065 3860,2070 ; U1.8 3673.7,2840 3846.3,2840 U1.5 ; U2.3 3813.7,1868.7 3860,1915 3860,2065 3860,2070 ; U1.3 3810,2281.3 U2.5 ; R14.2 4252.79,2200 4234.09,2181.3 U2.5 ; 3860,2070 3860,2170 3871.3,2181.3 U2.5
pads on no net: B1.7 B1.9 B1.10 B1.11 B1.12 B1.13 B1.14 B1.15 J1.2 J1.3 J1.4 J3.MH1 J3.MH2 R21.3 R21.4
copper on no net: | length 15483.4
  Bottom Layer w10: 1000,4625.41 ccw(c985,4700) 1043.72,4748.39 ; 1005.06,4620.35 1005.06,1385.42 cw(c995,1310) 1053.72,1261.61 ccw(c1155,1155) 1256.42,1048.51 ; 1043.51,4748.58 cw(c1150,4850) 1256.61,4951.28 ccw(c1305,5010) 1380.42,4999.94 ; 1256.61,1048.72 cw(c1305,990) 1379.59,1005 ; 1380.47,5000 4325.41,5000 ccw(c4400,5015) 4448.39,4956.28 ; 1384.54,1000.06 4319.58,1000.06 cw(c4395,990) 4443.39,1048.72 ccw(c4550,1150) 4656.49,1251.42 ; 4448.58,4956.49 cw(c4550,4850) 4651.28,4743.39 ccw(c4710,4695) 4699.94,4619.58 4699.94,1374.65 ; 4656.28,1251.61 cw(c4715,1300) 4700,1374.59

## Polygon pours and split planes (outlines as drawn)
GND on Bottom Layer "GND_L02_P001" (solid, remove dead copper, pour order 1): 1057.59,1258.43 ccw(c995,1310) 1076.1,1310 ccw(c995,1310) 1010.07,1389.69 1010.07,4620.35 1009.49,4622.69 ccw(c985,4700) 1066.1,4700 ccw(c985,4700) 1047.59,4751.57 1047.1,4752.08 cw(c1150,4850) 1252.98,4947.83 1253.43,4947.41 ccw(c1305,5010) 1384.7,4994.98 4321.41,4994.98 ccw(c4400,5015) 4451.57,4952.41 4452.08,4952.9 cw(c4550,4850) 4692.04,4850 cw(c4550,4850) 4647.83,4747.02 4647.41,4746.57 ccw(c4710,4695) 4694.93,4615.31 4694.93,1378.58 ccw(c4715,1300) 4652.41,1248.43 4652.9,1247.92 cw(c4550,1150) 4692.04,1150 cw(c4550,1150) 4447.02,1052.17 4446.57,1052.59 ccw(c4395,990) 4315.31,1005.07 1384.61,1005.07 1384.51,1005.99 ccw(c1305,990) 1253.43,1052.59 1252.92,1052.1 cw(c1155,1155)
GND on Top Layer "GND_L01_P000" (solid, remove dead copper, pour order 0): 1057.59,1258.43 ccw(c995,1310) 1076.1,1310 ccw(c995,1310) 1010.07,1389.69 1010.07,4620.35 1009.49,4622.69 ccw(c985,4700) 1066.1,4700 ccw(c985,4700) 1047.59,4751.57 1047.1,4752.08 cw(c1150,4850) 1252.98,4947.83 1253.43,4947.41 ccw(c1305,5010) 1384.7,4994.98 4321.41,4994.98 ccw(c4400,5015) 4451.57,4952.41 4452.08,4952.9 cw(c4550,4850) 4692.04,4850 cw(c4550,4850) 4647.83,4747.02 4647.41,4746.57 ccw(c4710,4695) 4694.93,4615.31 4694.93,1378.58 ccw(c4715,1300) 4652.41,1248.43 4652.9,1247.92 cw(c4550,1150) 4692.04,1150 cw(c4550,1150) 4447.02,1052.17 4446.57,1052.59 ccw(c4395,990) 4315.31,1005.07 1384.61,1005.07 1384.51,1005.99 ccw(c1305,990) 1253.43,1052.59 1252.92,1052.1 cw(c1155,1155)

## Other copper
Top Layer:
  text "Desined by 'Alghaith Mouhammed Alhameish'" at 4610.01,1865 h60 r90